# Altium PCB PCB1.pcbdoc
Units mm, origin at the board's own origin, x right, y up, seen from the top; angles counter-clockwise.
Board outline 138.14 x 94.64 mm, 2 copper layers (Top Layer, Bottom Layer); 56 components, 78 nets, 265 pads, 36 vias.
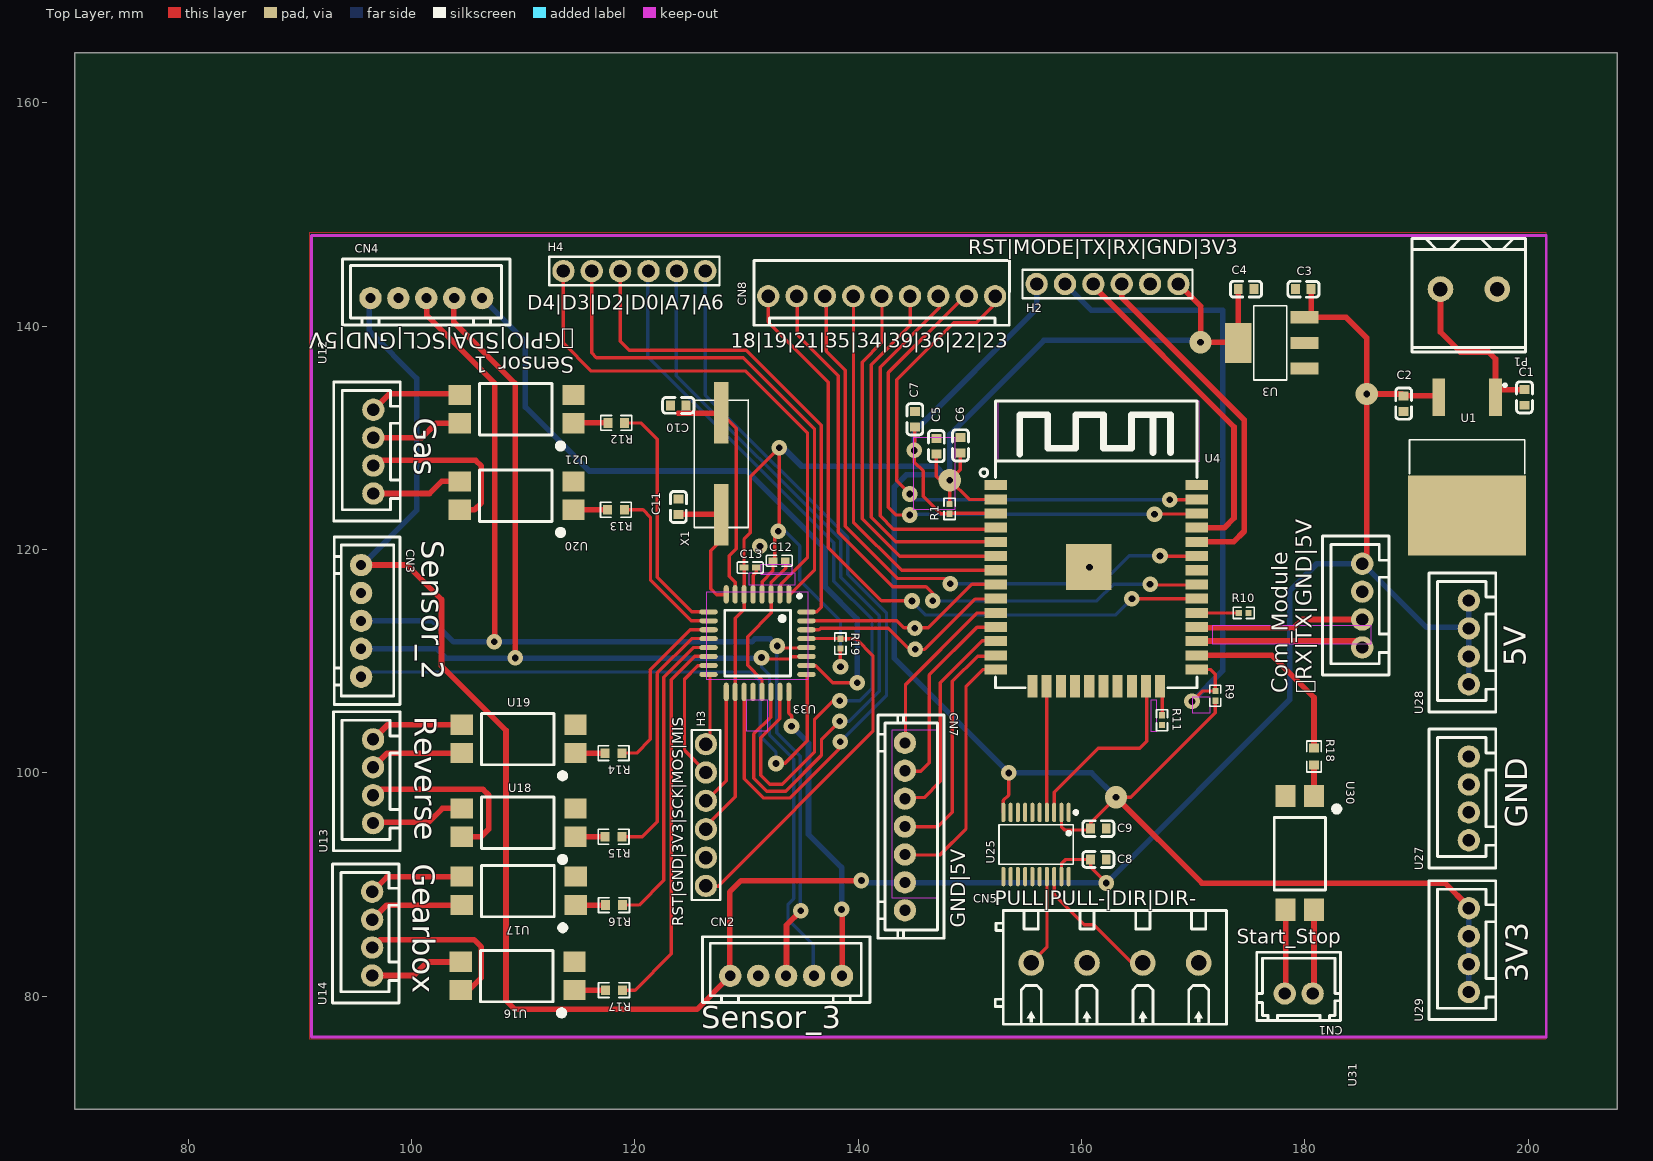
[diagram p0: Top Layer view]
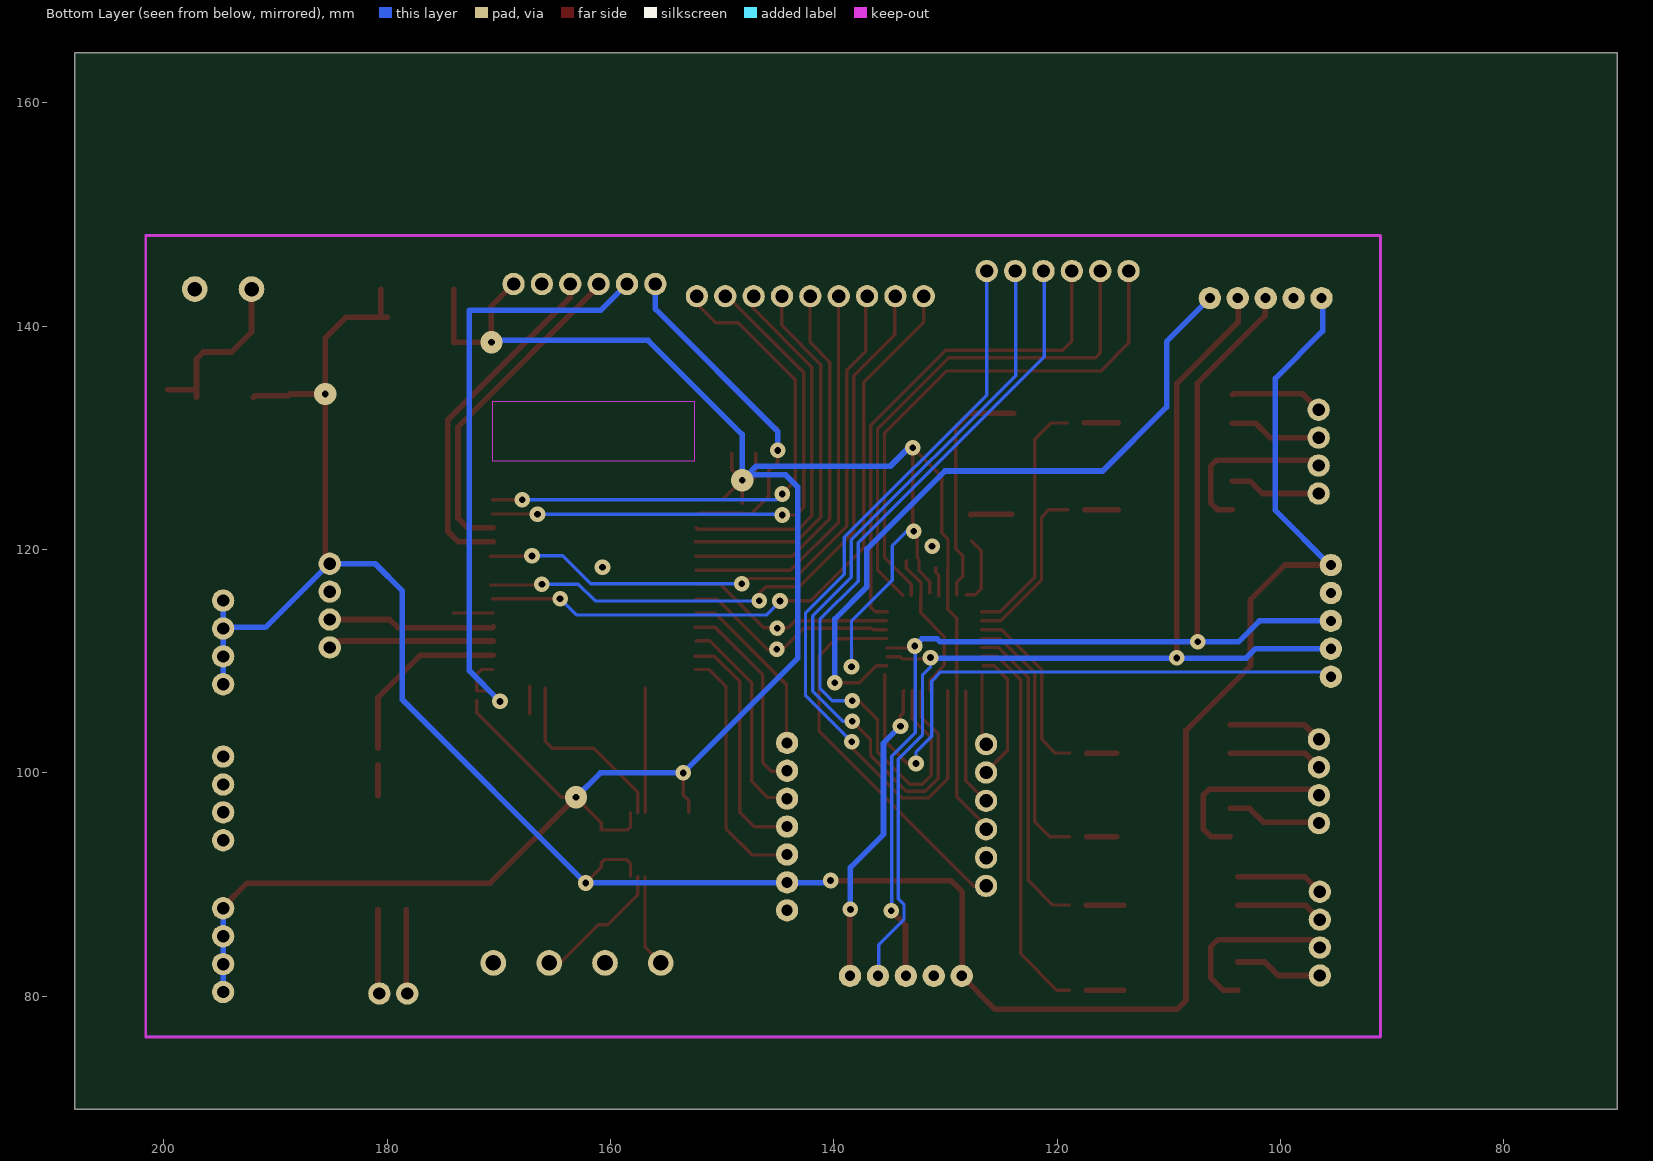
[diagram p1: Bottom Layer view, seen from below]

## Layer stack, top to bottom
Top Layer: signal copper (thickness not stored)
Dielectric: dielectric 0.32, FR-4, Dk 4.8
Bottom Layer: signal copper (thickness not stored)

## Board outline
207.988,69.85 69.85,69.85 69.85,164.488 207.988,164.488

## Components (designator, comment, footprint, x,y, rotation, side; value= is the part's Value field where it differs from the comment)
C1 "CAP_0603" C0603 199.68,133.625 r270 top
C2 "CAP_0603" C0603 188.86,133.066 r270 top
C3 "CAP_0603" C0603 179.879,143.316 r180 top
C4 "CAP_0603" C0603 174.748,143.316 r0 top
C5 "CL10A106MQ8NNNC" C0603 147.014,129.262 r90 top
C6 "100nF" C0603 149.173,129.339 r90 top
C7 "1uF" C0603 145.081,131.663 r270 top
C8 "CAP_0603" C0603 161.529,92.24 r0 top
C9 "CAP_0603" C0603 161.529,95.001 r0 top
C10 "CAP_0603" C0603 123.887,132.914 r180 top
C11 "CAP_0603" C0603 123.912,123.821 r90 top
C12 "CAP_0603" C0402 132.94,118.995 r180 top
C13 "CAP_0603" C0402 130.338,118.385 r180 top
CN1 "ZX-XH2.54-2PZZ" conn-th_2p-p2.50_hx25003-2a 179.462,80.234 r180 top
CN2 "HC-XH-5A-G" conn-th_5p-p2.50_hc-xh-5a-g#1 133.557,81.819 r0 top
CN3 "HC-XH-5A-G" conn-th_5p-p2.50_hc-xh-5a-g#1 95.489,113.61 r270 top
CN4 "HC-XH-5A-G" conn-th_5p-p2.50_hc-xh-5a-g#2 101.331,142.515 r0 top
CN5 "MX128-5.0-04P-GN01-Cu-Y-A" conn-th_4p-mx128-5.0-04p-gn01-cu-y-a 163.003,82.978 r0 top
CN7 "HC-XH-7A-G" conn-th_7p-p2.50_hc-xh-7a-g 144.196,95.188 r270 top
CN8 "HC-2510-9A" CONN-TH_9P-P2.54_HCTL_HC-2510-9A 142.111,142.692 r180 top
H2 "2.54-1x6P直针" hdr-th_6p-p2.54-v-m-1 162.342,143.785 r0 top
H3 "2.54-1x6P直针" hdr-th_6p-p2.54-v-m-1 126.376,96.223 r90 top
H4 "2.54-1x6P直针" hdr-th_6p-p2.54-v-m-1 119.96,144.943 r0 top
P1 "WJ500V-5.08-2P" conn-th_2p-p5.00_wj500v-5.08-2p 194.702,143.328 r180 top
R1 "SCR0402F10K" R0402 148.194,123.643 r90 top
R9 "SCR0402F10K" R0402 171.994,106.904 r270 top
R10 "SCR0402F10K" R0402 174.534,114.321 r0 top
R11 "SCR0402F10K" R0402 167.219,104.72 r270 top
R12 "Res_0603" R0603 118.349,131.339 r180 top
R13 "Res_0603" R0603 118.308,123.565 r180 top
R14 "Res_0603" R0603 118.105,101.771 r180 top
R15 "Res_0603" R0603 118.105,94.278 r180 top
R16 "Res_0603" R0603 118.146,88.159 r180 top
R17 "Res_0603" R0603 118.146,80.539 r180 top
R18 "Res_0603" R0603 180.833,101.469 r270 top
R19 "Res_0603" R0402 138.415,111.578 r270 top
U1 "L7805CD2T-TR" TO-263-2_L10.0-W9.1-P5.08-LS15.2-TL 194.549,128.342 r270 top
U3 "AMS1117-3.3_C5181460" SOT-223-3_L6.4-W3.5-P2.30-LS7.0-BR 177.021,138.507 r0 top
U4 "ESP32-WROOM-32-N4" WIFIM-SMD_ESP32-WROOM-32-N4 161.339,116.76 r0 top
U12 "ZX-XH2.54-4PZZ" conn-th_4p-p2.50_4pin 96.591,128.772 r90 top
U13 "ZX-XH2.54-4PZZ" conn-th_4p-p2.50_4pin 96.562,99.25 r90 top
U14 "ZX-XH2.54-4PZZ" conn-th_4p-p2.50_4pin 96.48,85.601 r90 top
U16 "EL817S1(B)(TU)-F" SOP-4_L6.5-W4.6-P2.54-LS10.2-TL 109.51,81.809 r180 top
U17 "EL817S1(B)(TU)-F" SOP-4_L6.5-W4.6-P2.54-LS10.2-TL 109.612,89.429 r180 top
U18 "EL817S1(B)(TU)-F" SOP-4_L6.5-W4.6-P2.54-LS10.2-TL 109.596,95.548 r180 top
U19 "EL817S1(B)(TU)-F" SOP-4_L6.5-W4.6-P2.54-LS10.2-TL 109.596,103.041 r180 top
U20 "EL817S1(B)(TU)-F" SOP-4_L6.5-W4.6-P2.54-LS10.2-TL 109.418,124.835 r180 top
U21 "EL817S1(B)(TU)-F" SOP-4_L6.5-W4.6-P2.54-LS10.2-TL 109.418,132.582 r180 top
U25 "TXS0108EPWR" TSSOP-20_L6.5-W4.4-P0.65-LS6.4-BL 155.939,93.583 r180 top
U27 "ZX-XH2.54-4PZZ" conn-th_4p-p2.50_4pin 194.702,97.71 r90 top
U28 "ZX-XH2.54-4PZZ" conn-th_4p-p2.50_4pin 194.702,111.68 r90 top
U29 "ZX-XH2.54-4PZZ" conn-th_4p-p2.50_4pin 194.702,84.121 r90 top
U30 "EL817S1(B)(TU)-F" SOP-4_L6.5-W4.6-P2.54-LS10.2-TL 179.563,92.833 r270 top
U31 "ZX-XH2.54-4PZZ" conn-th_4p-p2.50_4pin 185.151,114.982 r90 top
U33 "ATMEGA328P-AU_C14877" TQFP-32_L7.0-W7.0-P0.80-LS9.0-BL 130.994,111.617 r180 top
X1 "TAXM16M2GLFBET2T" HC-49S_L11.4-W4.8 127.747,127.682 r90 top

## Footprints (in the part's own frame and the unit in brackets; to place one, negate y for a bottom-side part, rotate by r counter-clockwise, add the part's x,y. Pads: shape width x height; smd on the part's side, far side on the other; paste and mask are expansions set on the pad)
C0402 [mm]
  rect 0.79x0.54 smd: 1(-0.545,0) 2(0.545,0)
  silkscreen extent -1.17,-0.5 1.17,0.5
C0603 [mm]
  rect 0.8x0.9 smd: 1(-0.7,0) 2(0.7,0)
  silkscreen extent -1.41,-0.71 1.39,0.72
conn-th_2p-p2.50_hx25003-2a [mm]
  round 2 hole 1.1: 1(-1.25,0) 2(1.25,0)
  silkscreen extent -3.75,-3.7 3.75,2.41
conn-th_2p-p5.00_wj500v-5.08-2p [mm]
  round 2.3 hole 1.3: 1(-2.54,0) 2(2.54,0)
  silkscreen extent -5.08,-4.52 5.08,5.64
conn-th_4p-mx128-5.0-04p-gn01-cu-y-a [mm]
  round 2.3 hole 1.4: 1(-7.5,0) 2(-2.5,0) 3(2.5,0) 4(7.5,0)
  silkscreen extent -10.71,-5.5 10,4.7
conn-th_4p-p2.50_4pin [mm]
  round 2 hole 1.1: 1(-3.75,0) 2(-1.25,0) 3(1.25,0) 4(3.75,0)
  silkscreen extent -6.22,-2.41 6.22,3.56
conn-th_5p-p2.50_hc-xh-5a-g#1 [mm]
  round 2 hole 0.914: 1(-5,0) 2(-2.5,0) 3(0,0) 4(2.5,0) 5(5,0)
  silkscreen extent -7.5,-2.4 7.5,3.5
conn-th_5p-p2.50_hc-xh-5a-g#2 [mm]
  round 2 hole 0.9: 1(-5,0) 2(-2.5,0) 3(0,0) 4(2.5,0) 5(5,0)
  silkscreen extent -7.5,-2.4 7.5,3.5
conn-th_7p-p2.50_hc-xh-7a-g [mm]
  round 2 hole 1: 1(-7.5,0) 2(-5,0) 3(-2.5,0) 4(0,0) 5(2.5,0) 6(5,0) 7(7.5,0)
  silkscreen extent -10,-2.4 10,3.5
CONN-TH_9P-P2.54_HCTL_HC-2510-9A [mm]
  round 2 hole 1.2: 1(-10.16,0) 2(-7.62,0) 3(-5.08,0) 4(-2.54,0) 5(0,0) 6(2.54,0) 7(5.08,0) 8(7.62,0) 9(10.16,0)
  silkscreen extent -11.46,-3.2 11.43,2.6
HC-49S_L11.4-W4.8 [mm]
  rect 5.5x1.3 smd: 1(-4.553,0) 2(4.553,0)
  silkscreen extent -5.71,-2.41 5.71,2.41
hdr-th_6p-p2.54-v-m-1 [mm]
  round 2 hole 1.2: 1(-6.35,0) 2(-3.81,0) 3(-1.27,0) 4(1.27,0) 5(3.81,0) 6(6.35,0)
  silkscreen extent -7.62,-1.27 7.62,1.27
R0402 [mm]
  rect 0.566x0.54 smd: 1(-0.433,0) 2(0.433,0)
  silkscreen extent -0.94,-0.5 0.94,0.5
R0603 [mm]
  rect 0.806x0.864 smd: 1(-0.753,0) 2(0.753,0)
  silkscreen extent -1.39,-0.66 1.39,0.66
SOP-4_L6.5-W4.6-P2.54-LS10.2-TL [mm]
  rect 2x1.8 smd: 1(-5.1,1.27) 2(-5.1,-1.27) 3(5.1,-1.27) 4(5.1,1.27)
  silkscreen extent -4.42,-2.29 3.32,3.79
SOT-223-3_L6.4-W3.5-P2.30-LS7.0-BR [mm]
  rect 2.5x1.1 smd: 1(2.97,-2.3) 2(2.97,0) 3(2.97,2.3)
  rect 2.34x3.6 smd: 4(-2.97,0)
  silkscreen extent -1.57,-3.33 1.37,3.33
TO-263-2_L10.0-W9.1-P5.08-LS15.2-TL [mil]
  rect 132.23x44.65 smd: 1(-208.1,100) 3(-208.1,-100)
  rect 282.7x416 smd: 4(208.11,0)
  silkscreen extent -256,-203 61,203
TQFP-32_L7.0-W7.0-P0.80-LS9.0-BL [mm]
  oval 0.45x1.65 smd: 1(-2.8,-4.369) 2(-2,-4.369) 3(-1.2,-4.369) 4(-0.4,-4.369) 5(0.4,-4.369) 6(1.2,-4.369) 7(2,-4.369) 8(2.8,-4.369) 17(2.8,4.369) 18(2,4.369) 19(1.2,4.369) 20(0.4,4.369) 21(-0.4,4.369) 22(-1.2,4.369) 23(-2,4.369) 24(-2.8,4.369)
  oval 1.65x0.45 smd: 9(4.381,-2.8) 10(4.381,-2) 11(4.381,-1.2) 12(4.381,-0.4) 13(4.381,0.4) 14(4.381,1.2) 15(4.381,2) 16(4.381,2.8) 25(-4.381,2.8) 26(-4.381,2) 27(-4.381,1.2) 28(-4.381,0.4) 29(-4.381,-0.4) 30(-4.381,-1.2) 31(-4.381,-2) 32(-4.381,-2.8)
  silkscreen extent -3.91,-4.36 2.94,2.95
TSSOP-20_L6.5-W4.4-P0.65-LS6.4-BL [mm]
  oval 0.364x1.742 smd: 1(-2.925,-2.871) 2(-2.275,-2.871) 3(-1.625,-2.871) 4(-0.975,-2.871) 5(-0.325,-2.871) 6(0.325,-2.871) 7(0.975,-2.871) 8(1.625,-2.871) 9(2.275,-2.871) 10(2.925,-2.871) 11(2.925,2.871) 12(2.275,2.871) 13(1.625,2.871) 14(0.975,2.871) 15(0.325,2.871) 16(-0.325,2.871) 17(-0.975,2.871) 18(-1.625,2.871) 19(-2.275,2.871) 20(-2.925,2.871)
  silkscreen extent -3.71,-3.02 3.33,1.77
WIFIM-SMD_ESP32-WROOM-32-N4 [mm]
  rect 2x0.9 smd: 1(-9,9.005) 2(-9,7.735) 3(-9,6.465) 4(-9,5.195) 5(-9,3.925) 6(-9,2.655) 7(-9,1.385) 8(-9,0.115) 9(-9,-1.155) 10(-9,-2.425) 11(-9,-3.695) 12(-9,-4.965) 13(-9,-6.235) 14(-9,-7.505) 25(9,-7.505) 26(9,-6.235) 27(9,-4.965) 28(9,-3.695) 29(9,-2.425) 30(9,-1.155) 31(9,0.115) 32(9,1.385) 33(9,2.655) 34(9,3.925) 35(9,5.195) 36(9,6.465) 37(9,7.735) 38(9,9.005)
  rect 0.9x2 smd: 15(-5.715,-9.005) 16(-4.445,-9.005) 17(-3.175,-9.005) 18(-1.905,-9.005) 19(-0.635,-9.005) 20(0.635,-9.005) 21(1.905,-9.005) 22(3.175,-9.005) 23(4.445,-9.005) 24(5.715,-9.005)
  rect 4.1x4.1 smd: 39(-0.68,1.665)
  silkscreen extent -10.41,-9.13 9.02,16.54

## Free pads (board coordinates)
  round 1.4 hole 0.6: 40(145.088,112.96) 41(145.108,111.065)

## Via types
v1: diameter 1.4, hole 0.6, Top Layer to Bottom Layer, 32 vias
v2: diameter 2, hole 0.6, Top Layer to Bottom Layer, 4 vias

## Nets (pads, with @x,y where several pads share a name; then routed paths per layer and width w, separated by ;. In a path a pad name is that pad's centre, name@x,y a point inside that pad or via, vN(x,y) a via of type N, cw(c..) or ccw(c..) an arc to the next point about the centre after c; other vN are vias at no path point)
3V3: C4.1 C5.1 C6.1 C9.1 C12.2 C13.2 H2.6 H3.3 R1.2 R9.2 R19.2 U3.4 U4.2 U25.2 U25.10 U29.1 U29.2 U29.3 U29.4 U33.4 U33.6 U33.18 | length 253.6
  Top Layer w0.3: H3.3@126.318,95.054 126.318,95.181 128.993,97.857 U33.18@128.993,107.437 ; U33.18@128.97,107.614 129.004,107.647 129.004,113.848 129.799,114.643 129.799,115.871 129.793,115.876 C13.2 ; C13.2@129.789,118.431 129.789,120.947 130.344,121.502 130.344,126.517 v1(132.932,129.104) 132.932,121.578 132.542,121.188 132.542,119.282 C12.2@132.466,119.206 ; U33.4@131.406,116.117 131.406,117.109 132.377,118.081 C12.2@132.377,118.998 ; R19.2@138.416,111.146 138.416,109.553 v1@138.433,109.536 ; C5.1@146.995,128.65 147.012,128.634 147.012,126.55 147.352,126.209 v2(148.22,126.209) ; R1.2@148.231,124.144 148.22,124.155 v2(148.22,126.209) ; C6.1@149.163,128.65 149.163,127.152 v2(148.22,126.209) ; U4.2@152.297,124.483 149.947,124.483 v2(148.22,126.209) ; U25.10 153.014,97.526 153.503,98.015 v1(153.503,99.996) ; U25.2 158.214,95.182 158.514,94.882 160.829,94.882 C9.1 160.829,95.536 v2(163.104,97.811) 164.425,97.811 171.994,105.38 R9.2
  Top Layer w0.5: v2(163.104,97.811) 170.791,90.124 192.574,90.124 U29.4@194.645,88.053 ; H2.6 170.673,141.804 v2(170.673,138.553) 174.005,138.553 U3.4@174.048,138.51 ; C4.1 U3.4@174.048,138.51 ; U3.4 U3.4@174.048,138.51
  Bottom Layer w0.3: v1(132.858,121.628) 133.484,121.628 134.789,120.324 134.789,117.236 138.429,113.596 v1(138.429,109.505)
  Bottom Layer w0.5: v1@133.034,129.384 134.958,127.459 146.97,127.459 v2@147.748,126.682 ; 144.306,126.682 v2@147.748,126.682 ; 144.324,126.701 143.247,125.624 143.247,110.251 v1(153.503,99.996) 160.92,99.996 v2(163.104,97.811) ; v2(170.673,138.553) 170.488,138.738 156.642,138.738 148.22,130.317 v2(148.22,126.209) v2@147.748,126.682 ; U29.1 U29.2 U29.3 U29.4
5V: C2.1 C3.1 C8.1 CN2.1 CN3.1 CN4.1 CN7.6 U1.3 U3.3 U25.19 U28.1 U28.2 U28.3 U28.4 U31.4 | length 239.7
  Top Layer w0.3: U25.19 158.214,91.855 158.6,92.24 160.529,92.24 160.829,91.94 160.829,91.552 v1(162.241,90.14)
  Top Layer w0.5: CN3.1@95.543,118.502 95.657,118.616 99.603,118.616 102.69,115.529 102.69,109.582 108.465,103.807 108.465,79.621 109.266,78.82 125.562,78.82 CN2.1@128.535,81.793 ; CN2.1@128.496,81.988 128.496,89.32 129.531,90.355 v1(140.3,90.355) ; U3.3 U3.3@180.568,140.807 ; C3.1 180.579,140.818 U3.3@180.568,140.807 ; U31.4 185.558,119.138 v2(185.558,133.93) ; U1.3 191.871,133.766 C2.1 188.696,133.93 v2(185.558,133.93) ; U3.3@180.568,140.807 183.71,140.807 185.558,138.959 v2(185.558,133.93)
  Bottom Layer w0.5: CN3.1@95.55,118.583 100.468,123.501 100.468,135.337 96.237,139.568 CN4.1@96.237,142.37 ; v1(140.3,90.355) 140.515,90.14 v1(162.241,90.14) 178.649,106.549 178.649,116.302 181.078,118.732 U31.4 ; U31.4@185.135,118.807 190.91,113.032 U28.3@194.684,113.032 ; U28.1 U28.2 U28.3 U28.4
12V: C1.1 P1.2 U1.1 | length 15.9
  Top Layer w0.5: P1.2 192.162,139.467 193.94,137.689 196.48,137.689 197.089,137.08 U1.1@197.089,134.477 ; U1.1 U1.1@197.089,134.477 ; C1.1 197.241,134.325 U1.1@197.089,134.477
$2N2413: R11.1 U4.24 | length 2.5
  Top Layer w0.3: R11.1@167.244,105.28 U4.24@167.244,107.755
$2N2416: R10.1 U4.29 | length 3.6
  Top Layer w0.3: U4.29@170.529,114.335 170.543,114.321 R10.1
$2N6727: R18.2 U30.1 | length 2.8
  Top Layer w0.5: U30.1 R18.2
$2N6838: CN1.2 U30.3 | length 7.5
  Top Layer w0.5: CN1.2 178.293,80.316 U30.3
$2N6842: CN1.1 U30.4 | length 7.5
  Top Layer w0.5: CN1.1 180.833,80.356 U30.4
$3N768: U13.4 U19.3 | length 8.5
  Top Layer w0.5: U13.4 97.873,104.311 U19.3
$3N769: U13.3 U19.4 | length 8.5
  Top Layer w0.5: U13.3 97.834,101.771 U19.4
$3N770: U14.4 U17.3 | length 7.9
  Top Layer w0.5: U14.4 97.81,90.681 U17.3@103.826,90.681
$3N771: U14.3 U17.4 | length 7.9
  Top Layer w0.5: U14.3 97.77,88.141 U17.4@103.826,88.141
$3N778: R17.2 U16.1 | length 3.4
  Top Layer w0.5: U16.1@114.027,80.521 117.375,80.521 R17.2
$3N779: R16.2 U17.1 | length 3.4
  Top Layer w0.5: U17.1@114.027,88.141 117.375,88.141 R16.2
$3N780: R15.2 U18.1 | length 2.7
  Top Layer w0.5: U18.1 R15.2
$3N781: R14.2 U19.1 | length 2.7
  Top Layer w0.5: U19.1 R14.2
$3N782: R13.2 U20.1 | length 3
  Top Layer w0.5: U20.1 R13.2
$3N783: R12.2 U21.1 | length 3.1
  Top Layer w0.5: U21.1 114.546,131.339 R12.2
$3N796: U12.4 U21.3 | length 8.4
  Top Layer w0.5: U12.4 98.014,133.944 104.226,133.944 U21.3
$3N797: U12.3 U21.4 | length 8.3
  Top Layer w0.5: U12.3 100.928,130.021 102.218,131.312 U21.4
$3N798: U12.2 U20.4 | length 15.6
  Top Layer w0.5: U12.2 97.056,127.986 105.751,127.986 106.259,127.478 106.259,124.176 105.647,123.565 U20.4
$3N799: U12.1 U20.3 | length 8.2
  Top Layer w0.5: U12.1 101.62,125.021 102.703,126.105 U20.3
$3N800: U13.1 U18.3 | length 8.5
  Top Layer w0.5: U13.1 96.638,95.576 101.535,95.576 102.777,96.818 U18.3
$3N801: U13.2 U18.4 | length 16.5
  Top Layer w0.5: U13.2 97.084,98.522 106.411,98.522 106.919,98.014 106.919,94.966 106.231,94.278 U18.4
$3N802: U14.1 U16.3 | length 7.8
  Top Layer w0.5: U14.1 100.205,81.851 101.415,83.061 U16.3@103.826,83.061
$3N803: U14.2 U16.4 | length 16
  Top Layer w0.5: U14.2 97.19,85.06 105.599,85.06 106.259,84.4 106.259,81.657 105.123,80.521 U16.4@103.826,80.521
$3N1277: C10.1 U33.7 X1.2 | length 21.1
  Top Layer w0.3: X1.2@127.826,132.113 129.08,130.859 129.08,120.05 128.461,119.432 128.461,117.602 128.995,117.068 U33.7@128.995,115.925
  Top Layer w0.5: 123.887,132.214 127.727,132.214 X1.2
$3N1282: C11.1 U33.8 X1.1 | length 9.8
  Top Layer w0.3: X1.1@127.648,120.728 126.809,119.889 126.809,116.484 127.343,115.95 U33.8@128.156,115.95
  Top Layer w0.5: C11.1@124.09,123.172 127.704,123.172 X1.1
A6: H4.6 U33.19 | length 70.2
  Top Layer w0.3: U33.19@129.808,107.348 129.808,99.47 131.537,97.742 133.875,97.742 138.394,102.261 v1(138.394,102.783)
  Bottom Layer w0.3: H4.6@126.274,144.949 126.311,144.912 126.311,133.839 139.067,121.083 139.067,117.788 142.549,114.307 142.549,106.938 v1(138.394,102.783)
A7: H4.5 U33.22 | length 69.8
  Top Layer w0.3: U33.22@132.172,107.348 132.172,104.984 130.673,103.485 130.673,99.495 131.819,98.349 133.516,98.349 136.721,101.553 136.721,102.965 v1(138.364,104.608)
  Bottom Layer w0.3: H4.5@123.792,144.885 123.731,144.824 123.731,135.566 138.437,120.86 138.437,117.506 141.893,114.049 141.893,107.287 139.214,104.608 v1(138.364,104.608)
C_DIR: U4.23 U25.3 | length 16.8
  Top Layer w0.3: U25.3@157.56,96.423 157.56,98.278 161.499,102.217 165.235,102.217 165.845,102.827 U4.23@165.845,107.604
C_PUL: U4.16 U25.4 | length 11.2
  Top Layer w0.3: U4.16@156.896,107.603 156.896,96.473 U25.4
CON1: CN7.5 U4.14 | length 22.5
  Top Layer w0.3: CN7.5@144.21,92.643 147.336,92.643 149.661,94.968 149.661,107.7 151.224,109.263 U4.14@152.406,109.263
CON2: CN7.4 U4.13 | length 21.5
  Top Layer w0.3: CN7.4@144.21,95.159 147.141,95.159 148.441,96.459 148.441,108.195 150.699,110.453 U4.13@152.49,110.453
CON3: CN7.3 U4.12 | length 19.2
  Top Layer w0.3: CN7.3@144.21,97.713 144.286,97.789 145.927,97.789 147.374,99.236 147.374,108.081 151.109,111.817 152.291,111.817 U4.12@152.329,111.779
CON4: CN7.2 U4.11 | length 18.2
  Top Layer w0.3: CN7.2@144.21,100.152 145.62,100.152 146.383,100.915 146.383,108.767 150.652,113.036 152.406,113.036 U4.11@152.444,112.998
CON5: CN7.1 U4.10 | length 15.9
  Top Layer w0.3: CN7.1@144.248,102.706 144.248,107.878 150.689,114.318 U4.10@152.353,114.318
D0: H4.4 U33.23 | length 69.5
  Top Layer w0.3: U33.23@132.985,107.348 132.985,104.832 131.282,103.129 131.282,99.8 132.098,98.984 132.098,98.975 133.217,98.975 136.097,101.856 136.097,104.77 137.774,106.447 v1(138.36,106.447)
  Bottom Layer w0.3: H4.4@121.183,144.936 121.158,144.911 121.158,137.281 137.821,120.619 137.821,117.169 141.252,113.738 141.252,107.563 140.135,106.447 v1(138.36,106.447)
D2: H4.3 U33.32 | length 45.3
  Top Layer w0.3: H4.3@118.693,144.817 118.69,144.814 118.69,138.642 119.491,137.841 129.988,137.841 136.698,131.131 136.698,114.827 136.293,114.423 U33.32@135.202,114.423
D3: H4.2 U33.1 | length 46
  Top Layer w0.3: H4.2@116.236,144.919 116.136,144.819 116.136,137.608 116.568,137.176 129.731,137.176 136.094,130.814 136.094,118.136 U33.1@133.846,115.889
D4: H4.1 U33.2 | length 47.2
  Top Layer w0.3: H4.1@113.627,144.902 113.593,144.867 113.593,138.504 116.113,135.984 129.943,135.984 135.466,130.461 135.466,119.279 133.06,116.873 U33.2@133.06,115.893
D_DIR: CN5.3 U25.18 | length 12.1
  Top Layer w0.3: U25.18 157.564,89.074 160.257,86.381 161.123,86.381 164.526,82.978 CN5.3
D_PUL: CN5.1 U25.17 | length 8.3
  Top Layer w0.3: CN5.1 156.914,84.389 U25.17
GND: C1.2 C2.2 C3.2 C4.2 C5.2 C6.2 C7.1 C8.2 C9.2 C10.2 C11.2 C12.1 C13.1 CN2.2 CN3.2 CN4.2 CN5.2 CN5.4 CN7.7 H2.5 H3.2 P1.1 R10.2 R11.2 U1.4 U3.1 U4.1 U4.15 U4.38 U4.39 U16.2 U17.2 U18.2 U19.2 U20.2 U21.2 U25.11 U27.1 U27.2 U27.3 U27.4 U30.2 U31.3 U33.3 U33.5 U33.21 | length 16.1
  Top Layer w0.3: U33.5@130.598,115.871 130.598,117.68 130.883,117.965 C13.1 ; U33.21@131.393,107.41 131.393,108.359 130.105,109.647 130.105,112.205 132.223,114.322 132.223,115.813 U33.3@132.206,115.83 ; U33.3@132.198,115.871 132.198,117.017 133.519,118.337 133.519,118.955 C12.1@133.492,118.982
  other v1: 160.724,118.427 131.208,120.299
GPIO18: CN8.9 U4.30 | length 61.1
  Top Layer w0.3: CN8.9@131.961,142.677 131.961,140.373 137.332,135.002 137.332,120.178 142.092,115.418 144.812,115.418 v1(144.834,115.395) ; v1(164.526,115.58) 164.552,115.606 U4.30@170.553,115.606
  Bottom Layer w0.3: v1(144.834,115.395) 144.834,115.335 146.029,114.14 163.086,114.14 v1(164.526,115.58)
GPIO19: CN8.8 U4.31 | length 58.7
  Top Layer w0.3: CN8.8@134.545,142.601 134.545,139.221 138.213,135.553 138.213,121.568 143.109,116.671 146.091,116.671 146.684,116.078 v1(146.684,115.414) ; v1(166.152,116.888) 166.214,116.826 U4.31@170.756,116.826
  Bottom Layer w0.3: v1(146.684,115.414) 146.7,115.398 161.391,115.398 162.882,116.888 v1(166.152,116.888)
GPIO21: CN8.7 U4.33 | length 56.4
  Top Layer w0.3: CN8.7@137.141,142.622 137.141,137.781 138.856,136.065 138.856,122.081 143.537,117.4 147.792,117.4 v1(148.266,116.926) ; v1(167.042,119.43) 167.078,119.393 U4.33@170.782,119.393
  Bottom Layer w0.3: v1(148.266,116.926) 161.776,116.926 164.28,119.43 v1(167.042,119.43)
GPIO22: CN8.2 U4.36 | length 50.1
  Top Layer w0.3: v1(144.628,123.098) 143.366,123.098 142.697,123.767 142.697,135.856 149.312,142.471 CN8.2@149.736,142.471 ; v1(166.546,123.165) 166.56,123.179 U4.36@170.629,123.179
  Bottom Layer w0.3: v1(144.628,123.098) 144.696,123.165 v1(166.546,123.165)
GPIO23: CN8.1 U4.37 | length 49.1
  Top Layer w0.3: v1(144.628,124.978) 143.459,126.147 143.459,135.215 148.567,140.323 150.6,140.323 152.226,141.95 CN8.1@152.226,142.585 ; v1(167.918,124.461) 170.564,124.461 U4.37@170.578,124.475
  Bottom Layer w0.3: v1(144.628,124.978) 145.145,124.461 v1(167.918,124.461)
GPIO34: CN8.5 U4.6 | length 34
  Top Layer w0.3: CN8.5@142.142,142.665 142.142,138.548 140.36,136.767 140.36,122.77 143.717,119.413 U4.6@152.383,119.413
GPIO35: CN8.6 U4.7 | length 34.6
  Top Layer w0.3: CN8.6@139.778,142.5 139.588,142.31 139.588,122.45 143.895,118.142 U4.7@152.32,118.142
GPIO36: CN8.3 U4.4 | length 32.8
  Top Layer w0.3: CN8.3@147.288,142.653 147.288,141.636 141.977,136.325 141.977,123.009 143.171,121.814 152.192,121.814 U4.4@152.345,121.967
GPIO39: CN8.4 U4.5 | length 33.3
  Top Layer w0.3: CN8.4@144.683,142.589 144.683,140.073 141.176,136.566 141.176,122.894 143.387,120.683 U4.5@152.408,120.683
MISO: H3.6 U33.16 | length 6.3
  Top Layer w0.3: H3.6@126.403,102.618 126.741,102.957 U33.16@126.741,108.802
MODE: H2.2 R9.1 U4.25 | length 56.8
  Top Layer w0.3: v1(169.911,106.396) 170.852,107.337 R9.1 ; U4.25@170.529,109.255 171.574,109.255 171.994,108.835 R9.1@171.994,107.439
  Bottom Layer w0.5: H2.2 160.869,141.448 172.656,141.448 172.656,109.141 v1(169.911,106.396)
MOSI: H3.5 U33.15 | length 11.7
  Top Layer w0.3: H3.5@126.369,100.111 124.454,102.025 124.454,108.388 125.648,109.581 U33.15@126.64,109.581
RESET: C7.2 H2.1 R1.1 U4.3 | length 32.9
  Top Layer w0.3: C7.2@145.062,130.908 145.062,128.896 v1(145.044,128.879) 145.044,127.821 145.828,127.037 145.828,124.783 147.404,123.208 R1.1@148.183,123.208 ; R1.1@148.164,123.263 152.077,123.263 U4.3@152.128,123.212
  Bottom Layer w0.5: v1(145.044,128.879) 145.044,130.596 155.992,141.544 H2.1
RESET_A: H3.1 R19.1 U33.29 | length 34.2
  Top Layer w0.3: H3.1@126.381,89.848 127.462,89.848 141.335,103.722 141.335,110.503 139.836,112.003 R19.1@138.388,112.003 ; U33.29@135.241,112.029 138.397,112.029 R19.1
RX: H2.4 U4.34 | length 31.1
  Top Layer w0.5: H2.4 163.612,142.584 174.585,131.612 174.585,121.636 173.633,120.685 U4.34@170.529,120.685
RX2: U4.27 U31.1 | length 14.9
  Top Layer w0.5: U4.27@170.517,111.807 184.576,111.807 U31.1
RX_A: pad.41 U4.9 U33.30 | length 19.8
  Top Layer w0.3: U33.30@135.313,112.828 135.333,112.808 136.502,112.808 136.651,112.956 142.703,112.956 144.605,111.054 145.956,111.054 150.471,115.569 U4.9@152.366,115.569
S_1: CN4.5 U33.26 | length 61.9
  Top Layer w0.3: U33.26@135.275,109.595 136.215,109.595 137.743,108.067 v1(139.919,108.067)
  Bottom Layer w0.5: CN4.5@106.357,142.474 110.207,138.624 110.207,132.754 115.925,127.036 130.067,127.036 137.043,120.06 137.043,116.668 139.919,113.792 v1(139.919,108.067)
S_2: CN3.5 U33.25 | length 53.8
  Top Layer w0.3: v1(132.646,100.838) 133.419,100.838 135.457,102.877 U33.25@135.457,108.798
  Bottom Layer w0.3: CN3.5@95.521,108.681 95.877,109.037 130.438,109.037 131.251,108.223 131.251,103.268 132.646,101.873 v1(132.646,100.838)
S_3: CN2.5 U33.24 | length 27.6
  Top Layer w0.3: U33.24@133.76,107.341 133.798,107.303 133.798,105.359 134.064,105.092 134.064,104.205 v1(134.039,104.18)
  Top Layer w0.5: v1(138.524,87.769) 138.601,87.693 CN2.5@138.601,81.763
  Bottom Layer w0.5: v1(134.039,104.18) 135.562,102.656 135.562,94.484 138.524,91.522 v1(138.524,87.769)
SCK: H3.4 U33.17 | length 10.6
  Top Layer w0.3: H3.4@126.42,97.493 128.205,99.279 U33.17@128.205,107.335
SCL: CN2.3 CN3.3 CN4.3 U33.28 | length 105.1
  Top Layer w0.3: v1(132.771,111.364) 132.954,111.181 U33.28@135.269,111.181
  Top Layer w0.5: CN4.3@101.384,142.444 101.384,140.957 107.476,134.864 107.476,111.809 v1(107.42,111.753) ; CN2.3@133.589,81.972 133.589,86.36 v1(134.875,87.646)
  Bottom Layer w0.3: v1(132.771,111.364) 132.728,111.322 132.728,103.576 134.825,101.479 134.825,87.696 v1(134.875,87.646)
  Bottom Layer w0.5: CN3.3@95.504,113.656 95.555,113.606 101.883,113.606 103.763,111.725 103.789,111.75 107.42,111.75 130.498,111.75 130.752,112.005 132.13,112.005 v1(132.771,111.364)
SDA: CN2.4 CN3.4 CN4.4 U33.27 | length 105.6
  Top Layer w0.3: v1(131.354,110.325) 131.481,110.198 133.868,110.198 134.06,110.39 U33.27@135.224,110.39
  Top Layer w0.5: CN4.4@103.785,142.672 103.785,140.385 109.288,134.882 v1(109.288,110.295)
  Bottom Layer w0.3: v1(131.354,110.325) 131.354,109.448 132.071,108.732 132.071,103.394 132.13,103.334 132.129,103.327 134.225,101.231 134.225,88.745 133.725,88.245 133.725,86.836 135.978,84.583 CN2.4@135.978,81.953
  Bottom Layer w0.5: CN3.4@95.479,111.122 102.226,111.122 103.071,110.277 131.306,110.277 v1(131.354,110.325)
SER1.1: R17.1 U33.14 | length 34.6
  Top Layer w0.3: R17.1 120.026,80.539 123.277,83.79 123.277,108.327 125.379,110.429 U33.14@126.756,110.429
SER1.2: R16.1 U33.13 | length 28.1
  Top Layer w0.3: R16.1 120.381,88.159 122.607,90.385 122.607,108.571 125.264,111.229 U33.13@126.756,111.229
SER2.1: R15.1 U33.12 | length 23.1
  Top Layer w0.3: R15.1 120.658,94.278 122.007,95.627 122.007,108.951 125.084,112.029 U33.12@126.756,112.029
SER2.2: R14.1 U33.11 | length 16.1
  Top Layer w0.3: R14.1 120.176,101.771 121.397,102.993 121.397,109.254 124.972,112.829 U33.11@126.756,112.829
SER3.1: R13.1 U33.10 | length 15.1
  Top Layer w0.3: R13.1 120.739,123.565 121.407,122.896 121.407,117.279 125.057,113.629 U33.10@126.756,113.629
SER3.2: R12.1 U33.9 | length 21.9
  Top Layer w0.3: R12.1 120.534,131.339 122.007,129.866 122.007,117.528 125.106,114.429 U33.9@126.756,114.429
START_STOP: R18.1 U4.26 | length 16.4
  Top Layer w0.5: U4.26@170.529,110.525 177.061,110.525 180.833,106.752 R18.1
TX: H2.3 U4.35 | length 29.7
  Top Layer w0.5: H2.3 161.072,143.582 173.671,130.984 173.671,122.818 172.807,121.955 U4.35@170.529,121.955
TX2: U4.28 U31.2 | length 15
  Top Layer w0.5: U4.28@170.529,113.065 170.594,113 179.055,113 179.787,113.732 U31.2
TX_A: pad.40 U4.8 U33.31 | length 18.9
  Top Layer w0.3: U33.31@135.322,113.625 143.465,113.625 144.11,112.98 146.287,112.98 150.198,116.89 U4.8@152.314,116.89
"": U3.2 U4.17 U4.18 U4.19 U4.20 U4.21 U4.22 U4.32 U25.1 U25.5 U25.6 U25.7 U25.8 U25.9 U25.12 U25.13 U25.14 U25.15 U25.16 U25.20 U33.20

## Polygon pours and split planes (outlines as drawn)
GND on Bottom Layer (solid, remove dead copper, pour order 0): 91.118,76.388 201.63,76.388 201.63,148.176 91.118,148.176
GND on Top Layer (solid, remove dead copper, pour order 1): 90.869,76.2 201.638,76.2 201.638,148.374 90.869,148.374

## Keep-outs
Top Layer:
  region net "": 171.725,111.578 185.964,111.578 185.964,113.173 171.725,113.173
  region net "": 130.222,116.844 134.394,116.844 134.394,117.898 130.222,117.898
  region net "": 144.955,123.595 148.717,123.595 148.717,129.999 144.955,129.999
  region net "": 131.285,117.795 134.116,117.795 134.116,118.634 131.285,118.634
  region net "": 129.996,103.772 131.893,103.772 131.893,106.517 129.996,106.517
  region net "": 142.997,88.822 147.037,88.822 147.037,103.804 142.997,103.804
  region net "": 166.201,103.732 166.754,103.732 166.754,106.499 166.201,106.499
  region net "": 169.91,105.363 171.548,105.363 171.548,106.786 169.91,106.786
  region net "": 126.395,108.373 135.553,108.373 135.553,116.191 126.395,116.191
Board Outline Layer:
  lines w0.254 net "": 91.054,76.332 201.63,76.332 201.63,148.119 91.054,148.119 91.054,76.332
Multi-Layer:
  region net "": 152.513,127.929 170.547,127.929 170.547,133.295 152.513,133.295

## Other copper
Top Layer:
  text "Поменять пины прошивки для атмеги. ПРосто UART+RST" at 76.608,155.727 h3.45

## Silkscreen, mask and mechanical layers (free items; w line width, h text height)
Top Silkscreen Layer:
  text "RST|MODE|TX|RX|GND|3V3" at 149.871,146.464 h1.3
  text "D4|D3|D2|D0|A7|A6" at 110.35,141.487 h1.3
  text "Sensor_1 /  GPIO|SDA|SCL|GND|5V" at 114.566,139.43 h1.45 r180
  text "18|19|21|35|34|39|36|22|23" at 128.611,138.072 h1.3
  text "Gas" at 100.23,131.813 h1.98 r270
  text "Sensor_2" at 100.941,120.817 h1.98 r270
  text "5V" at 199.816,109.566 h1.98 r90
  text "Com_Module /  RX|TX|GND|5V" at 180.643,107.138 h1.45 r90
  text "Reverse" at 100.306,105.071 h1.98 r270
  text "GND" at 199.918,95.102 h1.98 r90
  text "Gearbox" at 100.128,91.876 h1.98 r270
  text "PULL|PULL-|DIR|DIR-" at 152.227,88.122 h1.3
  text "RST|GND|3V3|SCK|MOS|MIS" at 124.34,86.279 h0.97 r90
  text "GND|5V" at 149.606,86.124 h1.3 r90
  text "Start_Stop" at 173.923,84.692 h1.3
  text "3V3" at 199.969,81.234 h1.98 r90
  text "Sensor_3" at 125.945,77.139 h1.98